# Altium PCB PCB1.1.PcbDoc (part 1 of 2)
Units mm, origin at the board's own origin, x right, y up, seen from the top; angles counter-clockwise.
Board outline 43 x 43 mm, 4 copper layers (Top Layer, Mid-Layer 1, Mid-Layer 2, Bottom Layer); 149 components, 104 nets, 520 pads, 244 vias.
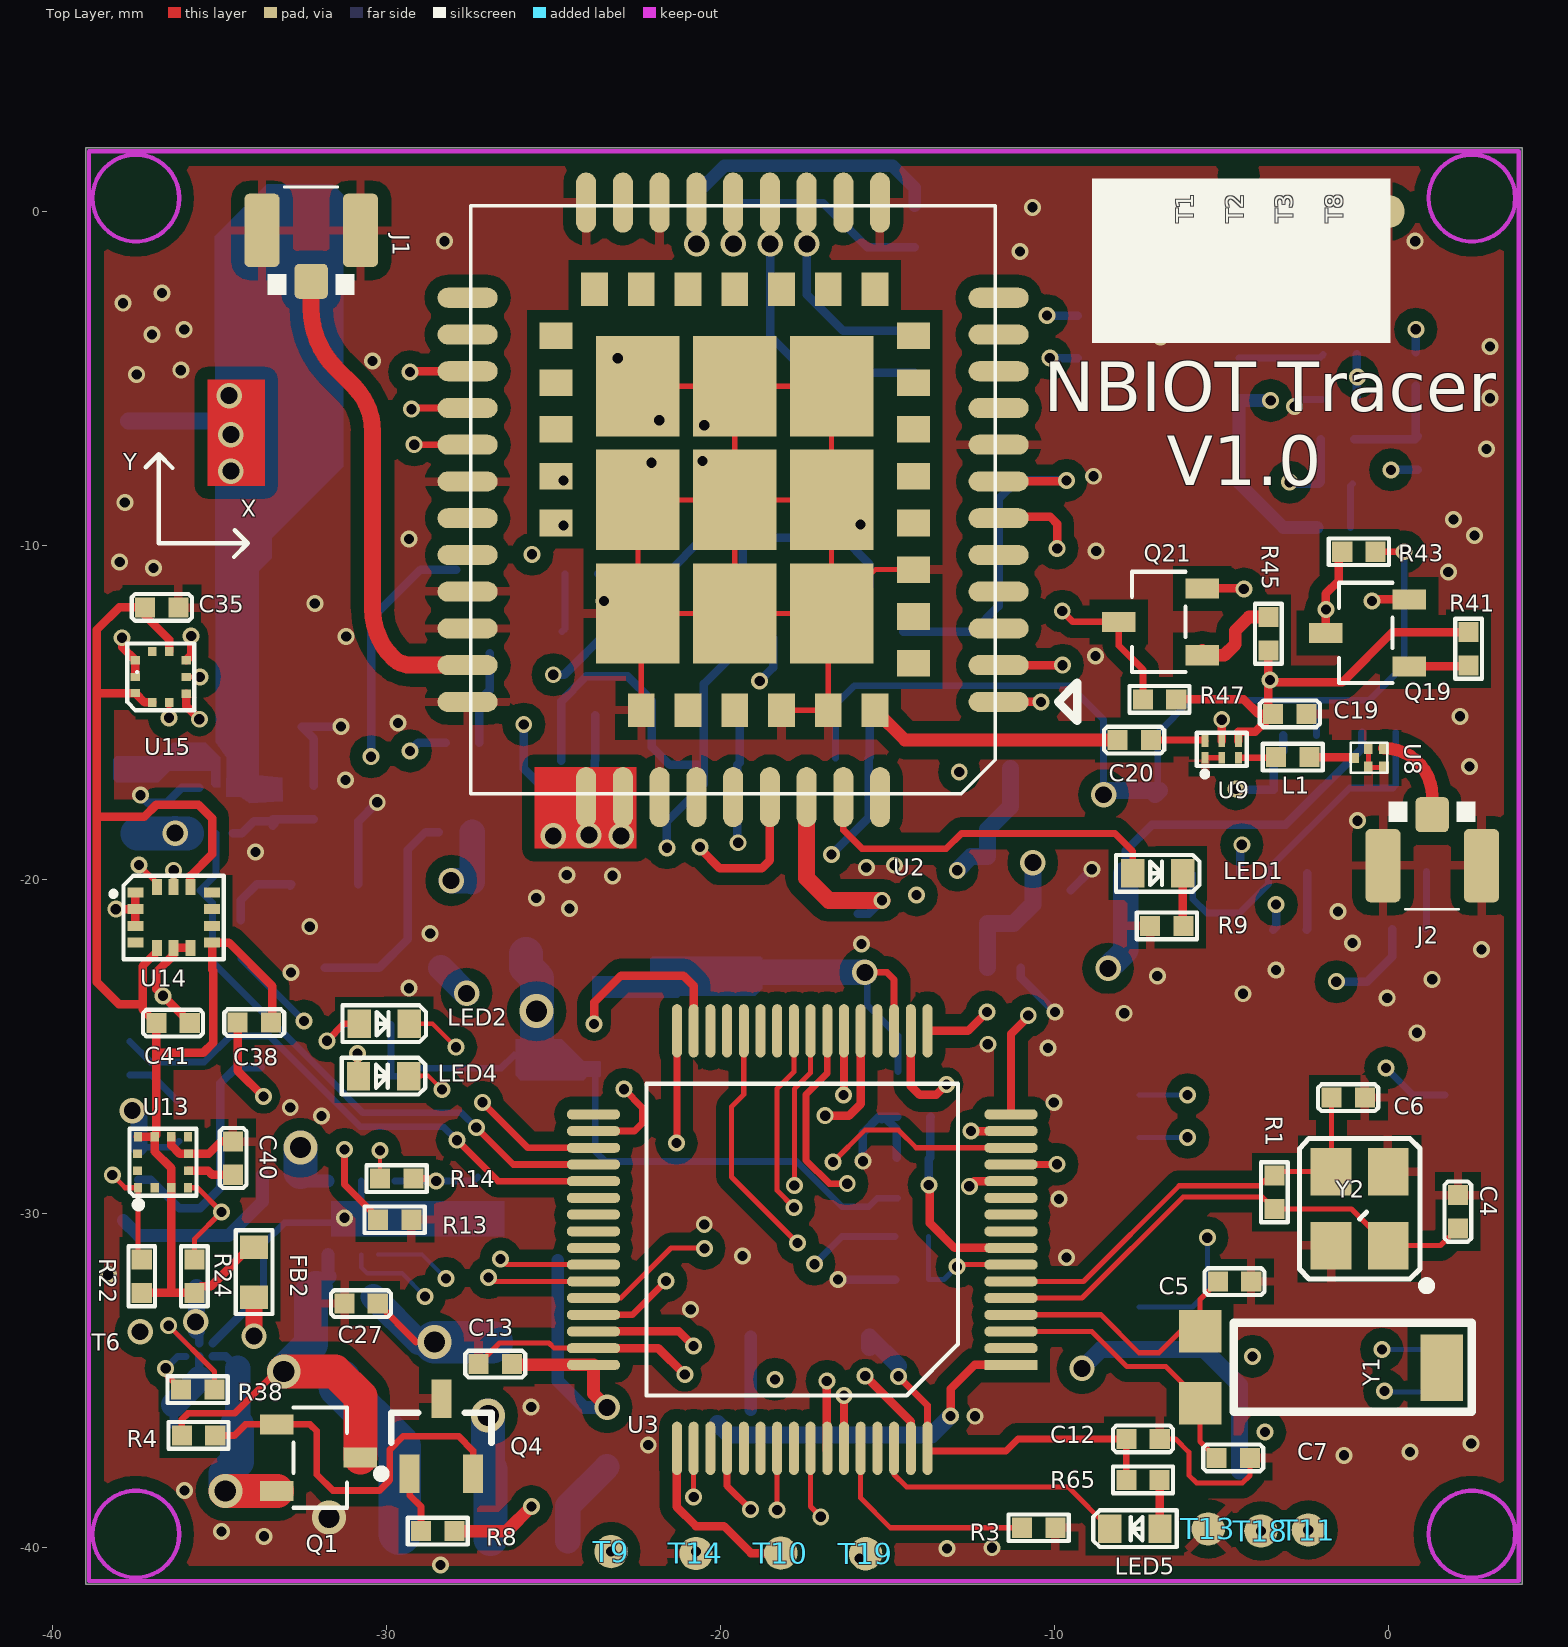
[diagram p0: Top Layer view]
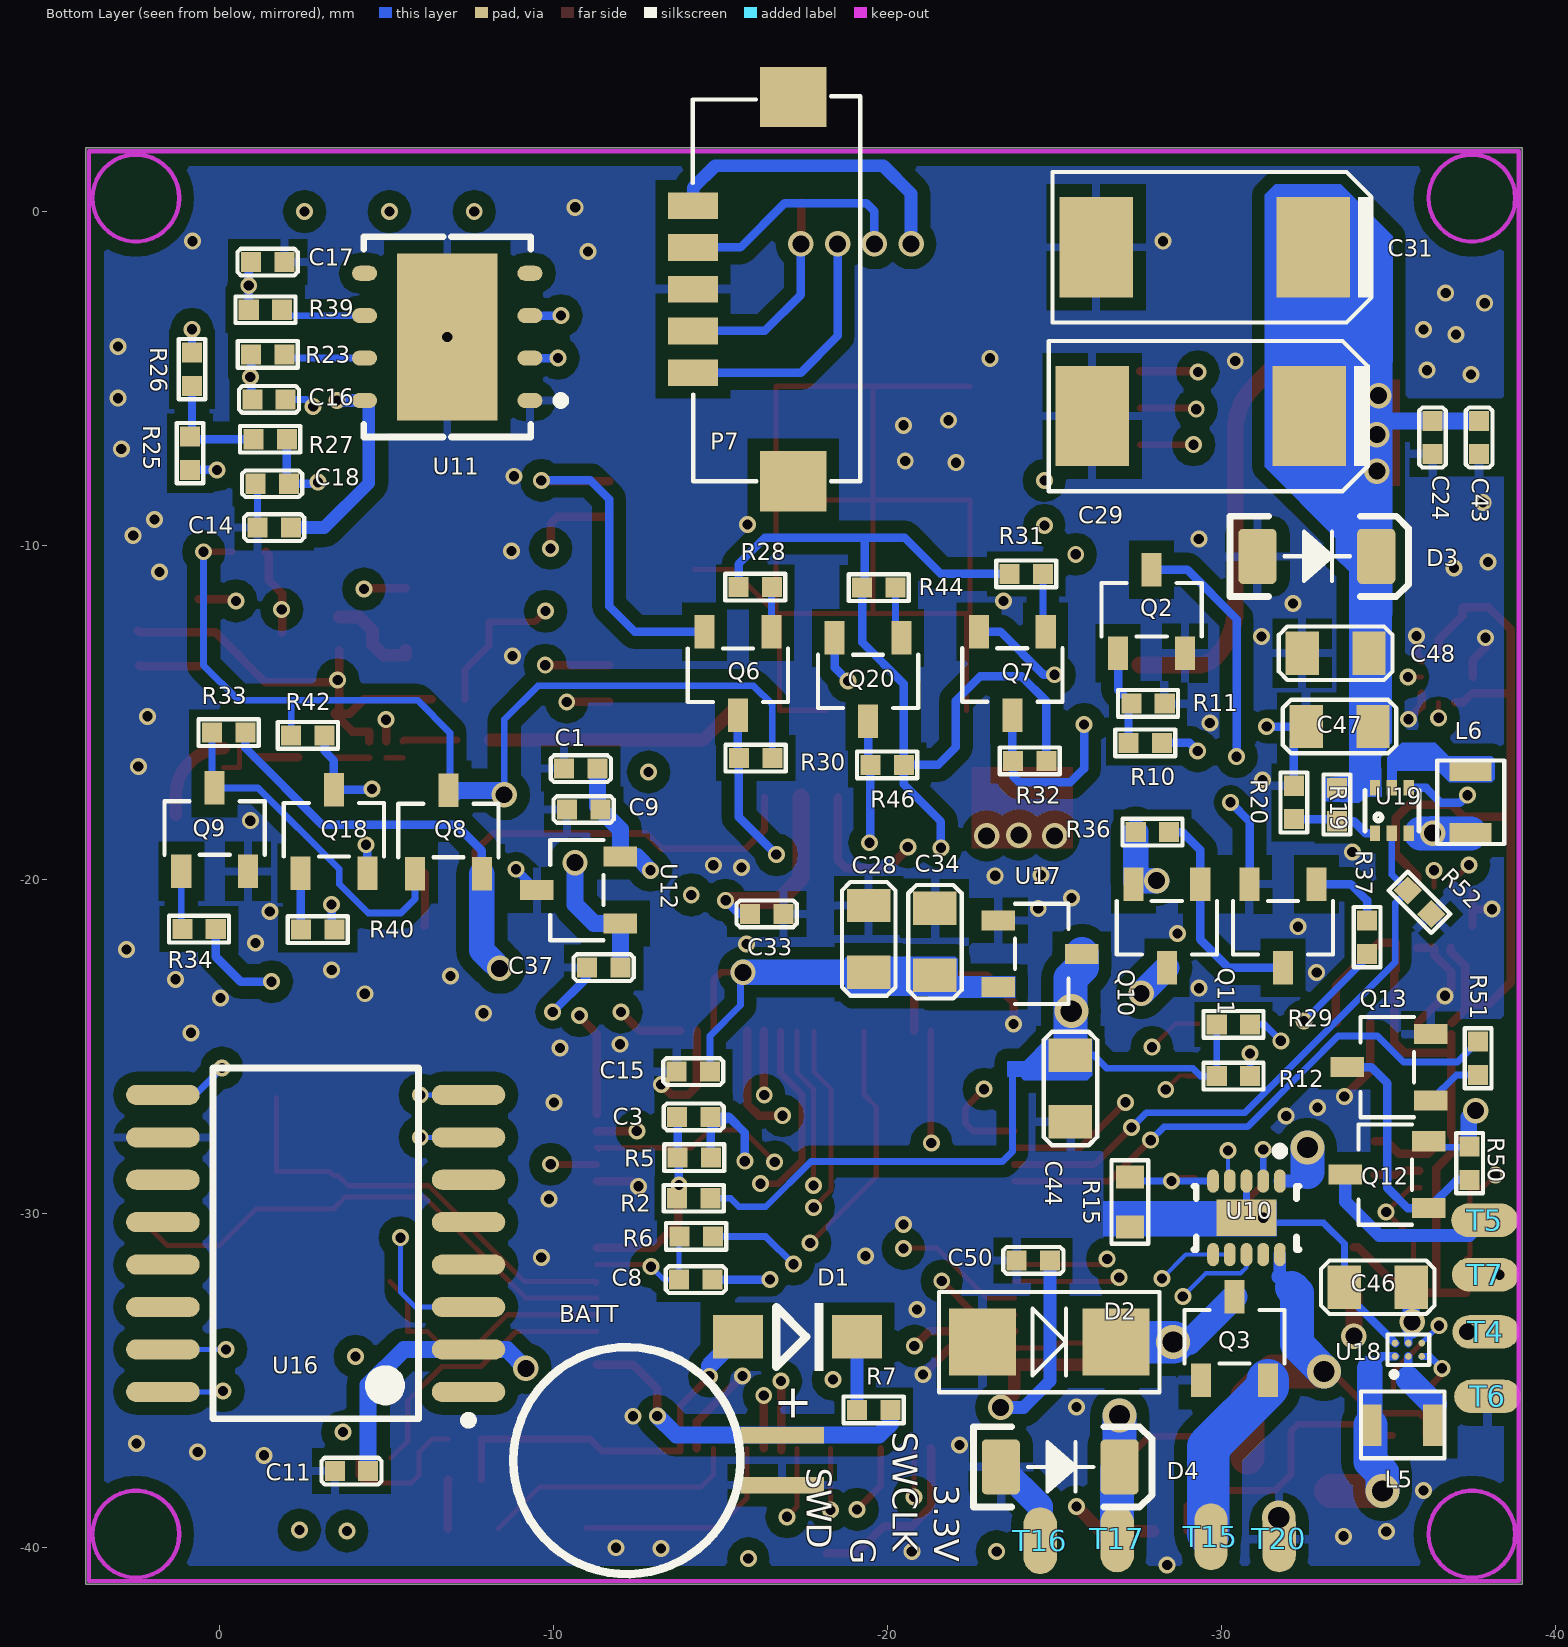
[diagram p1: Bottom Layer view, seen from below]
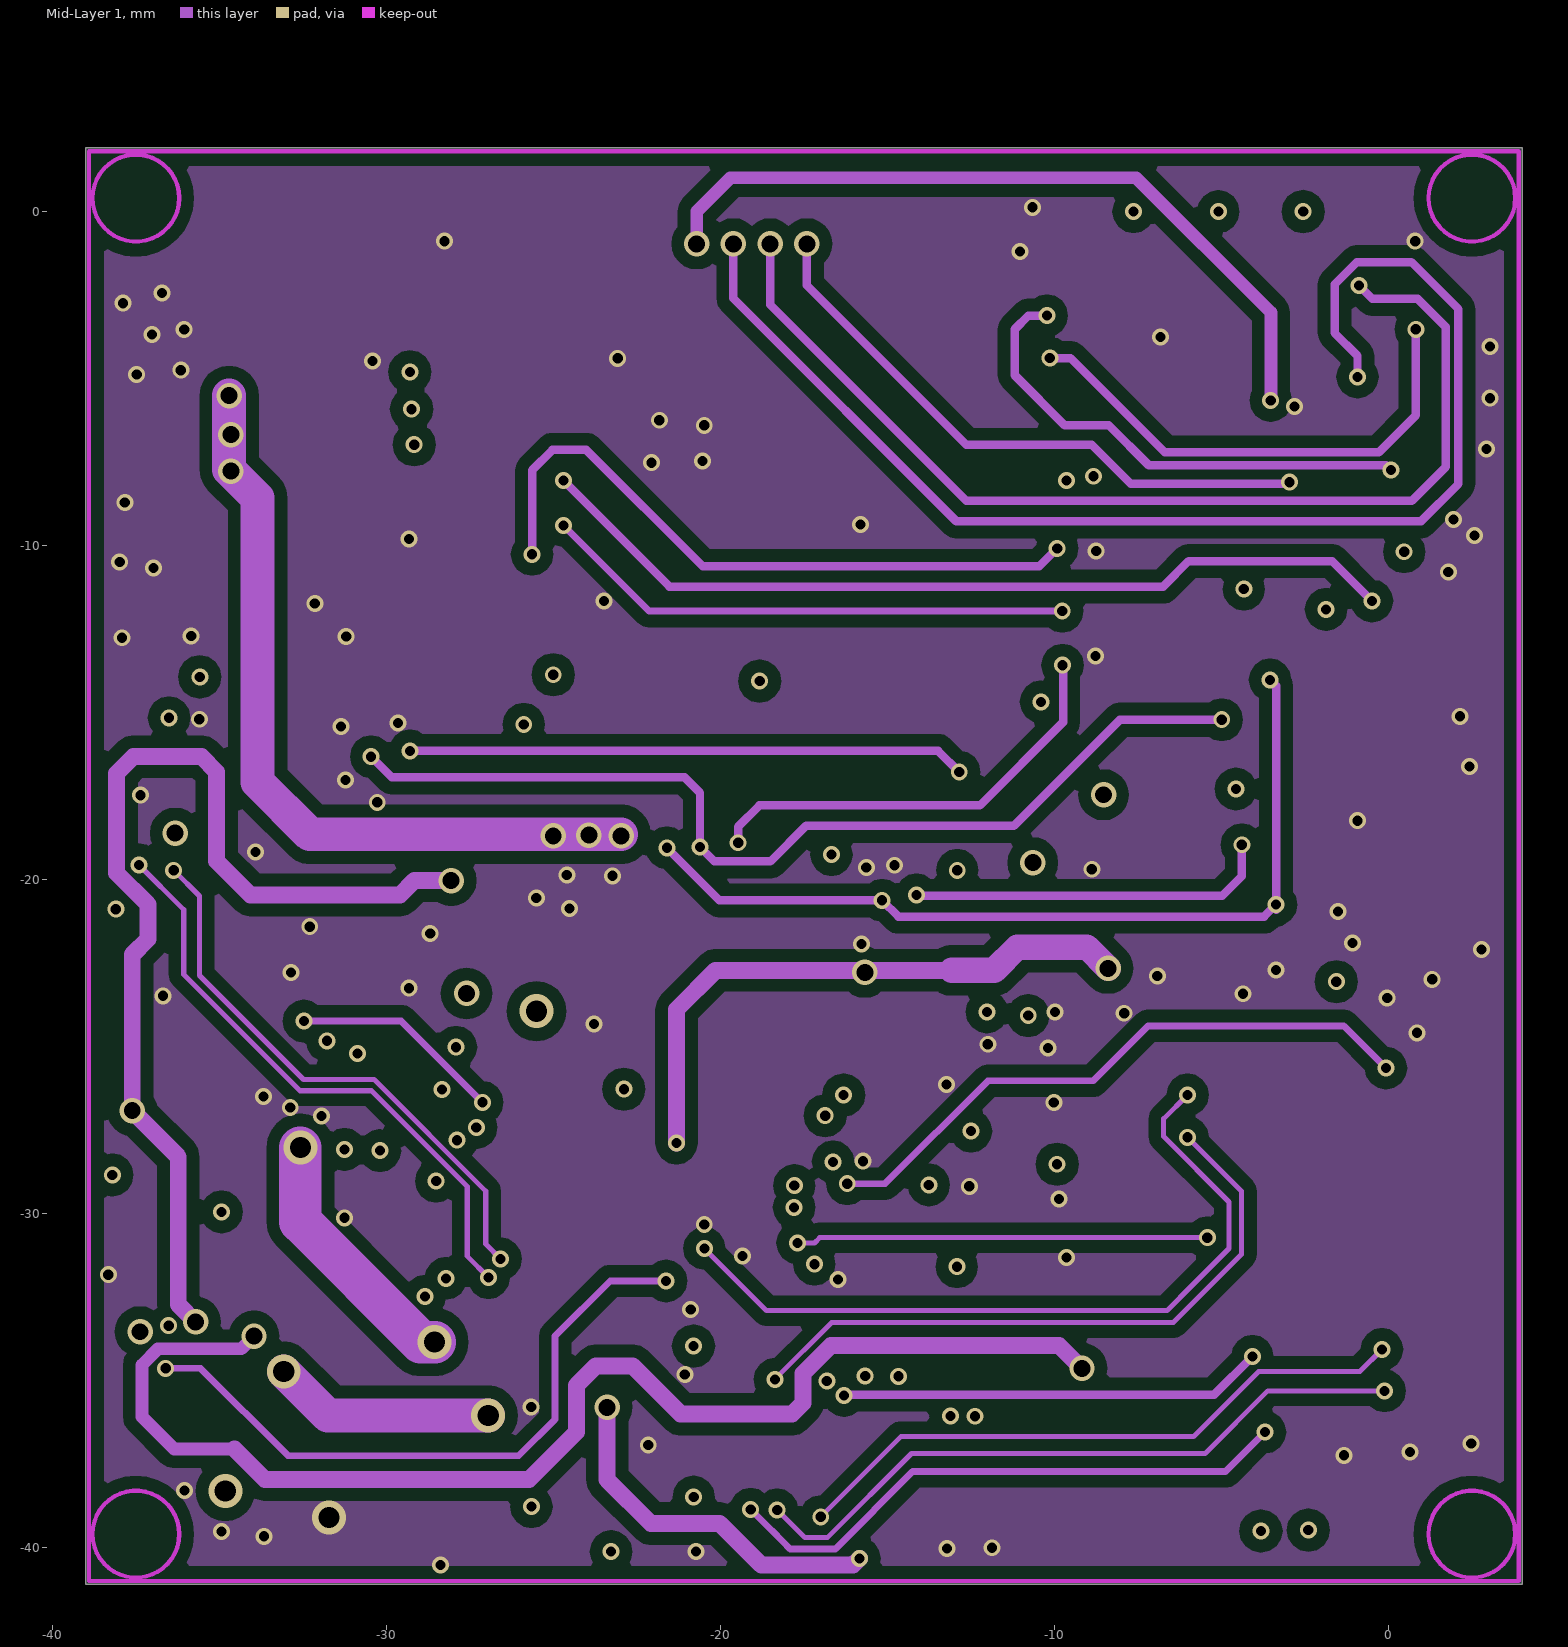
[diagram p2: Mid-Layer 1]
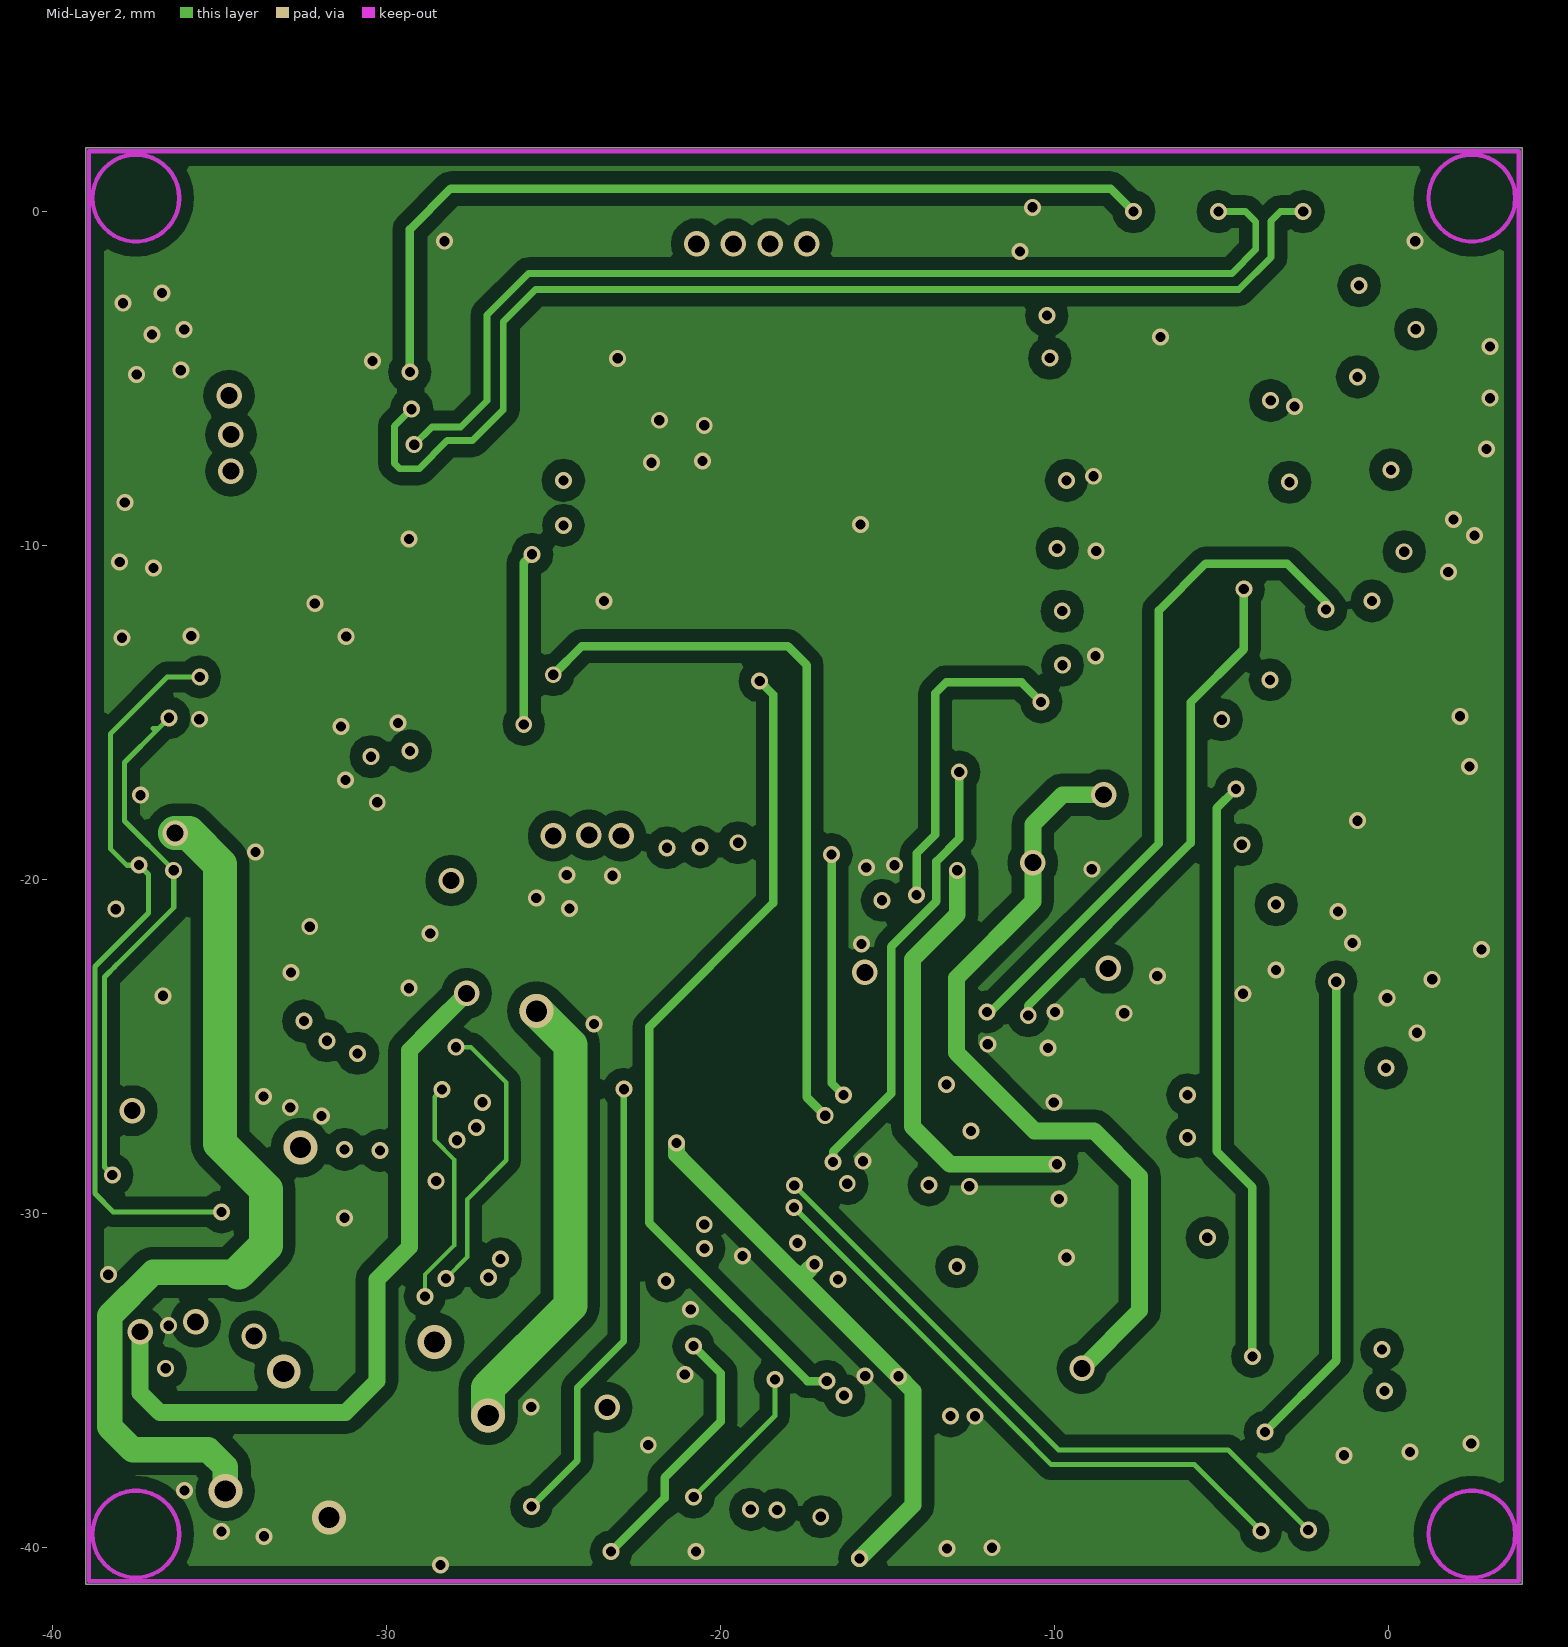
[diagram p3: Mid-Layer 2]

## Layer stack, top to bottom
Top Layer: signal copper 0.0356
Dielectric: core 0.32, FR-4, Dk 4.8
Mid-Layer 1: signal copper 0.0356
Dielectric: prepreg 0.32, FR-4, Dk 4.8
Mid-Layer 2: signal copper 0.0356
Dielectric: core 0.32, FR-4, Dk 4.8
Bottom Layer: signal copper 0.0356

## Board outline
-38.989,-41.097 -38.989,1.903 4.011,1.903 4.011,-41.097

## Design rules (kind name [scope] priority, off if disabled: settings)
Clearance [InPolygon  And InNet(AGND)] p1: gap=0.381
Clearance Clearance_1 [All] p2: gap=0.127
HoleToHoleClearance [All] p1: gap=0.127 allowstackedmicrovias=TRUE
MinimumSolderMaskSliver [All] p1: minsoldermaskwidth=0.025
PolygonConnect PolygonConnect_1 [InNet('AGND') And IsVia] p1: connectstyle=Direct reliefconductorwidth=0.254 reliefentries=4 polygonreliefangle="90 Angle"
PolygonConnect [All] p2: connectstyle=Relief reliefconductorwidth=0.254 reliefentries=4 polygonreliefangle="90 Angle"
RoutingVias [All] p1: holewidth=0.711 width=1.27 viastyle="Through Hole" minholewidth=0.711 minwidth=1.27 maxholewidth=0.711 maxwidth=1.27
SilkToSilkClearance [All] p1: silktosilkclearance=0.127
SilkscreenOverComponentPads [All] p1: minsilkscreentomaskgap=0.025
SolderMaskExpansion [All] p1: expansion=0.102
Width [All] p1: maxlimit=5.08 minlimit=0.127 preferedwidth=0.254
24 further rules are at their usual default settings.

## Classes and differential pairs
component class NBIOT: U2
component class CPU: BATT C3 C4 C5 C6 C7 C8 C9 C11 C12 C13 C15 C50 D1 LED5 R1 R2 R3 R5 R6 R7 R65 T9 T10 T11 T13 T14 T18 T19 U3 U16 U? Y1 Y2
component class GPS&&lte2: C14 C16 C17 C18 C19 C20 C24 C29 C31 C33 C43 D3 J1 J2 L1 LED1 P7 Q2 Q6 Q7 Q18 Q19 Q20 Q21 R9 R10 R11 R23 R25 R26 R27 R28 R30 R31 R32 R39 R40 R41 R42 R43 R44 R45 R46 R47 T1 T2 T3 T8 U8 U9 U11
component class power: C1 C27 C28 C34 C37 C44 C46 C47 C48 D2 D4 L5 L6 LED2 LED4 Q1 Q3 Q4 Q8 Q9 Q10 Q11 Q12 Q13 R4 R8 R12 R13 R14 R15 R19 R20 R29 R33 R34 R36 R37 R38 R50 R51 R52 T4 T5 T6 T7 T15 T16 T17 T20 U10 U12 U17 U18 U19
component class sensors: C35 C38 C40 C41 FB2 R22 R24 U13 U14 U15

## Components (designator, comment, footprint, x,y, rotation, side; value= is the part's Value field where it differs from the comment)
BATT "MS621FE" MS621FE -16.84,-37.383 r180 bottom
C1 "0.1uF/25V" 0402c -11.31,-16.681 r0 bottom
C3 "0.1uF/25v" 0402c -13.69,-27.103 r180 bottom
C4 "22pF" 0402c 2.09,-29.441 r270 top
C5 "6pF" 0402c -5.095,-32.038 r0 top
C6 "22pF" 0402c -0.694,-26.531 r180 top
C7 "6pF" 0402c -5.136,-37.314 r0 top
C8 "0.1uF/25V" 0402C -14.754,-31.977 r0 bottom
C9 "0.1uF/25V" 0402C -10.394,-17.903 r180 bottom
C11 "0.1uF/25V" 0402C -3.445,-37.711 r180 bottom
C12 "0.1uF/25V" 0402C -6.835,-36.749 r180 top
C13 "0.1uF/25V" 0402C -27.229,-34.504 r0 top
C14 "0.1uF" 0402C -1.128,-9.461 r180 bottom
C15 "0.1uF/25V" 0402C -13.675,-25.749 r180 bottom
C16 "10pF/NC" 0402C -1.975,-5.625 r0 bottom
C17 "10pF/NC" 0402C -1.932,-1.513 r0 bottom
C18 "10pF/NC" 0402C -1.067,-8.149 r180 bottom
C19 "0.1uF" 0402C -2.438,-15.037 r180 top
C20 "36pF" 0402c -8.103,-15.824 r0 top
C24 "10pF" 0402C -36.309,-7.265 r90 bottom
C27 "1uF/25V" 0402C -30.248,-32.697 r180 top
C28 "22uF/10V" 0805C -19.428,-22.776 r90 bottom
C29 "1000uF" 7343 -32.618,-6.125 r0 bottom
C31 "1000uF" 7343 -32.735,-1.069 r0 bottom
C33 "0.1uF/25V" 0402C -16.872,-21.025 r0 bottom
C34 "22uF/10V" 0805C -21.412,-22.859 r90 bottom
C35 "0.1uF/25V" 0402C -36.211,-11.851 r180 top
C37 "0.1uF/25V" 0402c -11.993,-22.635 r0 bottom
C38 "0.1uF/25V" 0402C -34.445,-24.286 r0 top
C40 "220nF" 0402c -34.578,-28.838 r90 top
C41 "0.1uF/25V" 0402C -35.876,-24.3 r180 top
C43 "33pF" 0402C -37.706,-7.265 r90 bottom
C44 "22uF/10V" 0805C -25.469,-25.256 r270 bottom
C46 "22uF/10V" 0805C -35.672,-32.206 r0 bottom
C47 "22uF/10V" 0805C -34.527,-15.418 r0 bottom
C48 "22uF/10V" 0805C -34.409,-13.223 r0 bottom
C50 "0.1uF/25V" 0402C -23.86,-31.4 r180 bottom
D1 "1N4148" DIODE_SOP -15.521,-33.693 r180 bottom
D2 "SMAJ12CA" SMA -22.836,-33.846 r180 bottom
D3 "DIODE_SCHOTTKY_0" LL-34(D1206) -32.847,-10.323 r180 bottom
D4 "DIODE_SCHOTTKY_0" LL-34(D1206) -25.164,-37.584 r180 bottom
FB2 "10R/1A" 0603R -33.952,-32.503 r90 top
J1 "IPEX" RF-UFL -32.241,-0.565 r0 top
J2 "IPEX" RF-UFL 1.321,-19.583 r180 top
L1 "LQW15A" 0402R -3.353,-16.332 r0 top
L5 "SRP4020TA-2R2M" L2520 -34.457,-36.336 r180 bottom
L6 "SRP4020TA-1R0M" L2520 -37.445,-16.725 r270 bottom
LED1 "LED" 0603LED -7.645,-19.812 r0 top
LED2 "LED" 0603LED -30.802,-24.316 r0 top
LED4 "LED" 0603LED -30.825,-25.886 r0 top
LED5 "LED" 0603LED -6.828,-39.433 r180 top
P7 "Header 5" 5×1.25mmSMT -14.173,-4.826 r90 bottom
Q1 "WNM2016-3/TR" sot23-3 -33.268,-36.31 r180 top
Q2 "MMBT3904" SOT23-3 -26.899,-13.221 r270 bottom
Q3 "Si2369DS" sot23-3 -29.382,-34.989 r270 bottom
Q4 "S8550" SOT95P240-3N -28.34,-36.666 r90 top
Q6 "MMBT3904" SOT23-3 -16.515,-12.583 r90 bottom
Q7 "MMBT3904" SOT23-3 -24.73,-12.577 r90 bottom
Q8 "Si2369DS" sot23-3 -5.846,-19.831 r270 bottom
Q9 "S8050" SOT23-3 1.152,-19.756 r270 bottom
Q10 "Si2369DS" sot23-3 -29.356,-20.14 r90 bottom
Q11 "S8050" SOT23-3 -32.833,-20.14 r90 bottom
Q12 "Si2369DS" sot23-3 -36.195,-29.834 r180 bottom
Q13 "S8050" SOT23-3 -36.253,-26.618 r180 bottom
Q18 "MMBT3904" SOT23-3 -2.42,-19.807 r270 bottom
Q19 "MMBT3904" SOT23-3 0.635,-13.614 r0 top
Q20 "MMBT3904" SOT23-3 -20.411,-12.766 r90 bottom
Q21 "MMBT3904" SOT23-3 -5.563,-13.284 r0 top
R1 "1MR" 0402R -3.404,-29.862 r90 top
R2 "10K/1%" 0402R -14.69,-29.541 r0 bottom
R3 "100K" 0402R -10.962,-39.406 r0 top
R4 "4K7" 0402R -36.113,-36.64 r0 top
R5 "10K/1%" 0402R -13.706,-28.322 r180 bottom
R6 "10K" 0402R -14.761,-30.684 r0 bottom
R7 "470" 0402R -19.077,-35.878 r180 bottom
R8 "4K7" 0402R -28.95,-39.51 r0 top
R9 "1K" 0402R -6.121,-21.387 r180 top
R10 "4.7K" 0402R -27.207,-15.906 r180 bottom
R11 "47K" 0402R -27.292,-14.723 r180 bottom
R12 "1K/1%" 0402R -29.85,-25.886 r180 bottom
R13 "3.95K/1%" 0402R -30.241,-30.185 r0 top
R14 "21.5k/1%" 0402R -29.184,-28.953 r180 top
R15 "RTH103AT" 0603R -27.252,-30.403 r90 bottom
R19 "534K/1%" 0402R -33.449,-17.254 r270 bottom
R20 "100K/1%" 0402R -32.16,-17.191 r270 bottom
R22 "4.7K" 0402R -37.313,-32.377 r90 top
R23 "10R" 0402R -0.937,-4.274 r180 bottom
R24 "4.7K" 0402R -35.738,-31.377 r270 top
R25 "0R" 0402R 0.891,-7.734 r90 bottom
R26 "0R" 0402R 0.83,-4.219 r270 bottom
R27 "10R" 0402R -2.01,-6.818 r0 bottom
R28 "4.7K" 0402R -16.532,-11.242 r0 bottom
R29 "1K/1%" 0402R -29.85,-24.336 r180 bottom
R30 "10K" 0402R -15.543,-16.365 r180 bottom
R31 "4.7K" 0402R -24.645,-10.847 r0 bottom
R32 "4.7K" 0402R -23.751,-16.447 r180 bottom
R33 "4K7" 0402R -0.766,-15.598 r0 bottom
R34 "4K7" 0402R 1.12,-21.483 r180 bottom
R36 "4K7" 0402R -27.425,-18.576 r180 bottom
R37 "4K7" 0402R -34.352,-21.225 r270 bottom
R38 "10K/1%" 0402R -35.138,-35.268 r180 top
R39 "10R" 0402R -0.868,-2.941 r180 bottom
R40 "4.7K" 0402R -2.436,-21.5 r180 bottom
R41 "4.7K" 0402R 2.413,-13.589 r90 top
R42 "10K" 0402R -3.138,-15.686 r0 bottom
R43 "10K" 0402R -1.372,-10.185 r0 top
R44 "4.7K" 0402R -20.232,-11.261 r0 bottom
R45 "4.7K" 0402R -3.581,-12.141 r270 top
R46 "4.7K" 0402R -19.481,-16.57 r180 bottom
R47 "4.7K" 0402R -7.341,-14.605 r0 top
R50 "4K7" 0402R -37.421,-27.99 r270 bottom
R51 "4K7" 0402R -37.672,-25.848 r90 bottom
R52 "10K/1%" 0402R -36.273,-21.033 r45 bottom
R65 "1K" 0402R -6.837,-37.975 r180 top
T1 "TPD" TPD#1 -4.47,0 r90 top
T2 "TPD" TPD#2 -2.98,0 r90 top
T3 "TPD" TPD#3 -1.49,0 r90 top
T4 "TPD" TP#1 -37.904,-33.543 r180 top
T5 "TPD" TP#1 -37.87,-30.2 r180 top
T6 "TPD" TP#1 -37.958,-35.473 r0 top
T7 "TPD" TP#1 -37.893,-31.831 r180 top
T8 "TPD" TPD#4 0,0 r90 top
T9 "TPD" TPd#1 -23.26,-40.12 r90 top
T10 "TPD" TPd#2 -20.445,-40.165 r270 top
T11 "TPD" TPd#1 -2.387,-39.475 r135 top
T13 "TPD" TPd#1 -5.384,-39.443 r135 top
T14 "TPD" TPd#3 -21.776,-40.176 r270 top
T15 "TPD" TP#1 -29.677,-39.676 r270 top
T16 "TPD" TP#1 -24.564,-39.793 r270 top
T17 "TPD" TP#2 -26.869,-39.742 r270 bottom
T18 "TPD" TPd#1 -3.806,-39.504 r135 top
T19 "TPD" TPd#4 -19.009,-40.186 r135 top
T20 "TPD" TP#1 -31.719,-39.739 r270 top
U2 "SIM7080G" SIM868 -11.659,-14.681 r180 top
U3 "stm32l412r8t6" LQFP-64 -11.288,-34.53 r180 top
U8 "SAFFB1G56KB0F0A" SAFFB1G56KB0F0A -1.016,-16.358 r0 top
U9 "AW5005DNR" AW5005 -4.978,-16.104 r90 top
U10 "bq24210" QFN50P200X300X80-10N -30.739,-30.128 r270 bottom
U11 "SLI76CF3600P" QFN127P500X600X80-8N -6.812,-3.752 r0 bottom
U12 "REF3025AIDBZR" SOT23-3 -11.993,-21.314 r180 bottom
U13 "LIS2MDL" LIS2MDL -36.677,-28.464 r90 top
U14 "LSM6DS3TR" LSM6DS3TR-C -36.356,-21.138 r0 top
U15 "BMP388" BMP388 -36.744,-13.934 r180 top
U16 "MX25L51245GMI-10G" SOP127P1030X239-16N -2.873,-30.892 r0 bottom
U17 "MCP33-30" SOT23-3 -23.311,-21.222 r0 bottom
U18 "TPS610997YFFR" TPS610997YFFR -35.587,-34.077 r90 bottom
U19 "TPS61023" SOT563-6 -35.088,-17.94 r180 bottom
Y1 "MC-146 32.768K/6pF" 32.768K -5.629,-35.684 r90 top
Y2 "8MHz" OSCILLATOR-3.2X2.5 -0.847,-29.858 r90 top

## Footprints (in the part's own frame and the unit in brackets; to place one, negate y for a bottom-side part, rotate by r counter-clockwise, add the part's x,y. Pads: shape width x height; smd on the part's side, far side on the other; paste and mask are expansions set on the pad)
5×1.25mmSMT [mm]
  rect 1.8x2 smd: 0(-3.25,-3) 0(8.25,-3)
  rect 0.8x1.5 smd: 1(0,0) 2(1.25,0) 3(2.5,0) 4(3.75,0) 5(5,0)
  round 0.5 on Bottom Overlay: ""(-0.875,0.432)
  silkscreen extent -3.25,-5 8.28,0.02
32.768K [mm]
  rect 1.27x1.27 smd: 1(0,0) 2(2.159,0)
  rect 2x1.27 smd: 3(1.07,-7.239)
  silkscreen extent -0.25,-8.13 2.41,-1.02
0402c [mm]
  rect 0.6x0.6 smd: 1(0,0) 2(1,0)
  silkscreen extent -0.4,-0.4 1.4,0.4
0402C [mm]
  rect 0.6x0.6 smd: 1(0,0) 2(1,0)
  silkscreen extent -0.4,-0.4 1.4,0.4
0402R [mm]
  rect 0.6x0.6 smd: 1(0,0) 2(1,0)
  silkscreen extent -0.4,-0.4 1.4,0.4
0603LED [mm]
  rect 0.7x0.85 smd: 1(0,0) 2(1.5,0)
  silkscreen extent -0.5,-0.55 2,0.55
0603R [mm]
  rect 0.7x0.85 smd: 1(0,0) 2(1.5,0)
  silkscreen extent -0.5,-0.55 2,0.55
0805C [mm]
  rect 1x1.3 smd: 1(0,0) 2(2,0)
  silkscreen extent -0.7,-0.8 2.7,0.8
7343 [mm]
  rect 2.2x3 smd: 1(0,0) 2(6.5,0)
  silkscreen extent -1.75,-2.25 7.8,2.25
AW5005 [mm]
  rect 0.35x0.2 smd: 1(-0.25,0.5) 2(-0.25,0) 3(-0.25,-0.5) 4(0.25,-0.5) 5(0.25,0) 6(0.25,0.5)
  silkscreen extent -0.77,-0.75 0.5,0.75
BMP388 [mm]
  rect 0.25x0.275 smd: 1(0.25,0.763) 2(-0.25,0.763) 6(-0.25,-0.763) 7(0.25,-0.763)
  rect 0.275x0.25 smd: 3(-0.762,0.5) 4(-0.762,0) 5(-0.762,-0.5) 8(0.763,-0.5) 9(0.763,0) 10(0.763,0.483)
  silkscreen extent -1,-1 1,1
DIODE_SOP [mm]
  rect 1.5x1.3 smd: 1(0,0) 2(3.556,0)
  silkscreen extent 1.14,-1.02 2.56,1.02
L2520 [mm]
  rect 0.65x1.25 smd: 1(0,0) 2(1.9,0)
  silkscreen extent -0.29,-0.99 2.21,1.01
LIS2MDL [mm]
  rect 0.275x0.25 smd: 1(-0.763,0.75) 2(-0.763,0.25) 3(-0.763,-0.25) 4(-0.763,-0.75) 7(0.763,-0.75) 8(0.763,-0.25) 9(0.763,0.25) 10(0.763,0.75)
  rect 0.25x0.275 smd: 5(-0.25,-0.763) 6(0.25,-0.763) 11(0.25,0.762) 12(-0.25,0.762)
  silkscreen extent -1.35,-1 1,1
LL-34(D1206) [mil]
  rrect25% 45x65 smd: 1(-70,0) 2(70,0)
  silkscreen extent -102,-47 108,47, body extent -70,-28 68,30, height 56
LQFP-64 [mm]
  rect 1.6x0.3 smd: 1(0,0)
  oval 1.6x0.3 smd: 2(0,-0.5) 3(0,-1) 4(0,-1.5) 5(0,-2) 6(0,-2.5) 7(0,-3) 8(0,-3.5) 9(0,-4) 10(0,-4.5) 11(0,-5) 12(0,-5.5) 13(0,-6) 14(0,-6.5) 15(0,-7) 16(0,-7.5) 33(12.5,-7.5) 34(12.5,-7) 35(12.5,-6.5) 36(12.5,-6) 37(12.5,-5.5) 38(12.5,-5) 39(12.5,-4.5) 40(12.5,-4) 41(12.5,-3.5) 42(12.5,-3) 43(12.5,-2.5) 44(12.5,-2) 45(12.5,-1.5) 46(12.5,-1) 47(12.5,-0.5) 48(12.5,0)
  oval 0.3x1.6 smd: 17(2.5,-10) 18(3,-10) 19(3.5,-10) 20(4,-10) 21(4.5,-10) 22(5,-10) 23(5.5,-10) 24(6,-10) 25(6.5,-10) 26(7,-10) 27(7.5,-10) 28(8,-10) 29(8.5,-10) 30(9,-10) 31(9.5,-10) 32(10,-10) 49(10,2.5) 50(9.5,2.5) 51(9,2.5) 52(8.5,2.5) 53(8,2.5) 54(7.5,2.5) 55(7,2.5) 56(6.5,2.5) 57(6,2.5) 58(5.5,2.5) 59(5,2.5) 60(4.5,2.5) 61(4,2.5) 62(3.5,2.5) 63(3,2.5) 64(2.5,2.5)
  silkscreen extent 1.59,-8.41 10.91,0.91
LSM6DS3TR-C [mm]
  rect 0.48x0.3 smd: 1(-1.15,0.75) 2(-1.15,0.25) 3(-1.15,-0.25) 4(-1.15,-0.75) 8(1.15,-0.75) 9(1.15,-0.25) 10(1.15,0.25) 11(1.15,0.75)
  rect 0.3x0.48 smd: 5(-0.5,-0.91) 6(0,-0.91) 7(0.5,-0.91) 12(0.5,0.91) 13(0,0.91) 14(-0.5,0.91)
  silkscreen extent -1.83,-1.25 1.5,1.25
MS621FE [mm]
  rect 2.5x0.5 smd: 1(0,-0.749) 2(0,0.749)
  silkscreen extent -8.05,-3.41 -1.25,3.39
OSCILLATOR-3.2X2.5 [mil] "OSCILLATOR-3.2X2.5"
  rect 56x48 smd: 1(-43.31,-33.46) 2(44,-33.46) 3(44,34) 4(-43.31,34)
  silkscreen extent -95,-83 83,71
QFN50P200X300X80-10N [mm] "QFN, 10-Leads, Body 2.9x1.9mm (max), Pitch 0.50mm, IPC Medium Density"
  oval 0.7x0.35 smd: 1(-1.1,1) 2(-1.1,0.5) 3(-1.1,0) 4(-1.1,-0.5) 5(-1.1,-1) 6(1.1,-1) 7(1.1,-0.5) 8(1.1,0) 9(1.1,0.5) 10(1.1,1)
  rect 1.1x1.8 smd: 11(0,0)
  silkscreen extent -2.12,-1.58 0.95,1.58, body extent -0.95,-1.45 0.95,1.45, height 0.8
QFN127P500X600X80-8N [mm] "QFN, 8-Leads, Body 6.0x5.0mm (max), Pitch 1.27mm, IPC Medium Density"
  oval 0.75x0.45 smd: 1(-2.475,1.905) 2(-2.475,0.635) 3(-2.475,-0.635) 4(-2.475,-1.905) 5(2.475,-1.905) 6(2.475,-0.635) 7(2.475,0.635) 8(2.475,1.905)
  rect 3x5 smd: 9(0,0)
  silkscreen extent -3.52,-3 2.5,3
RF-UFL [mm]
  rrect30% 1x1.05 smd: 1(0,-1.525)
  rrect30% 1.05x2.2 smd: 2(-1.475,0) 2(1.475,0)
  silkscreen extent -1.3,-1.93 1.3,1.3, body extent -1.7,-1.55 1.7,1.55, height 1.25
SAFFB1G56KB0F0A [mm]
  rect 0.3x0.3 smd: 1(0,0)
  rect 0.25x0.35 smd: 2(0.425,-0.287) 5(0.425,0.288)
  rect 0.3x0.35 smd: 3(0.9,-0.287) 4(0.9,0.288)
  silkscreen extent -0.1,-0.44 1,0.46
SIM868 [mm]
  oval 1.8x0.6 smd: 1(0,0) 2(0,-1.1) 3(0,-2.2) 4(0,-3.3) 5(0,-4.4) 6(0,-5.5) 7(0,-6.6) 8(0,-7.7) 9(0,-8.8) 10(0,-9.9) 11(0,-11) 12(0,-12.1) 22(15.9,-12.1) 23(15.9,-11) 24(15.9,-9.9) 25(15.9,-8.8) 26(15.9,-7.7) 27(15.9,-6.6) 28(15.9,-5.5) 29(15.9,-4.4) 30(15.9,-3.3) 31(15.9,-2.2) 32(15.9,-1.1) 33(15.9,0)
  oval 0.6x1.8 smd: 13(3.55,-14.95) 14(4.65,-14.95) 15(5.75,-14.95) 16(6.85,-14.95) 17(7.95,-14.95) 18(9.05,-14.95) 19(10.15,-14.95) 20(11.25,-14.95) 21(12.35,-14.95) 34(12.35,2.85) 35(11.25,2.85) 36(10.15,2.85) 37(9.05,2.85) 38(7.95,2.85) 39(6.85,2.85) 40(5.75,2.85) 41(4.65,2.85) 42(3.55,2.85)
  rect 1x0.8 smd: 43(2.549,-1.159) 44(2.549,-2.559) 45(2.549,-3.959) 46(2.549,-5.359) 47(2.549,-6.759) 48(2.549,-8.159) 49(2.549,-9.559) 50(2.549,-10.959) 58(13.251,-10.959) 59(13.251,-9.559) 60(13.251,-8.159) 61(13.251,-6.759) 62(13.251,-5.359)
  rect 0.8x1 smd: 51(3.7,-12.359) 52(5.1,-12.359) 53(6.5,-12.359) 54(7.9,-12.359) 55(9.3,-12.359) 56(10.7,-12.359) 57(12.1,-12.359) 63(10.7,0.25) 64(9.3,0.25) 65(7.9,0.25) 66(6.5,0.25) 67(5.1,0.25) 68(3.7,0.25)
  rect 2.5x3 smd: 69(5,-2.65) 70(5,-6.05) 71(5,-9.45) 72(7.9,-9.45) 73(10.8,-9.45) 74(10.8,-6.05) 75(10.8,-2.65) 76(7.9,-2.65) 77(7.9,-6.05)
  silkscreen extent -2.35,-14.85 15.8,2.75
SMA [mm]
  rect 2x2 smd: 1(0,0) 2(4,0)
  silkscreen extent -1.3,-1.5 5.3,1.5
SOP127P1030X239-16N [mm] "SOP, 16-Leads, Body 10.5x7.6mm (max), Pitch 1.27mm, IPC Medium Density"
  oval 2.2x0.6 smd: 1(-4.575,4.445) 2(-4.575,3.175) 3(-4.575,1.905) 4(-4.575,0.635) 5(-4.575,-0.635) 6(-4.575,-1.905) 7(-4.575,-3.175) 8(-4.575,-4.445) 9(4.575,-4.445) 10(4.575,-3.175) 11(4.575,-1.905) 12(4.575,-0.635) 13(4.575,0.635) 14(4.575,1.905) 15(4.575,3.175) 16(4.575,4.445)
  silkscreen extent -4.7,-5.25 3.07,5.42, body extent -3.8,-5.25 3.8,5.25, height 2.39
sot23-3 [mm]
  rect 1x0.6 smd: 1(0,0) 2(0,2) 3(-2.5,1)
  silkscreen extent -2.1,-0.5 -0.5,2.5
SOT23-3 [mm]
  rect 1x0.6 smd: 1(0,0) 2(0,2) 3(-2.5,1)
  silkscreen extent -2.1,-0.5 -0.5,2.5
SOT95P240-3N [mm] "SOT23, 3-Leads, Body 2.9x1.3mm, Pitch 0.95mm, Lead Span 2.4mm, IPC Medium Density"
  rect 1.15x0.6 smd: 1(-1.125,0.95) 2(-1.125,-0.95) 3(1.125,0)
  silkscreen extent -1.25,-1.5 0.7,1.92, body extent -0.7,-1.5 0.7,1.5, height 1.14
SOT563-6 [mil] "SOT563-6"
  rect 12x18 smd: 1(-19.68,-26.57) 2(0,-26.57) 3(20,-26.57) 4(20,27) 5(0,27) 6(-19.69,27)
  silkscreen extent -31,-24 32,24
TP#1 [mm]
  oval 2x1 smd far side: 1(0,0)
TP#2 [mm]
  oval 2x1 smd: 1(0,0)
TPD#1 [mm]
  round 1 smd: 1(0,3.15)
TPD#2 [mm]
  round 1 smd: 1(0,2.1)
TPD#3 [mm]
  round 1 smd: 1(0,1.05)
TPD#4 [mm]
  round 1 smd: 1(0,0)
TPd#1 [mm]
  round 1 smd: 1(0,0)
TPd#2 [mm]
  round 1 smd: 1(0,2.265)
TPd#3 [mm]
  round 1 smd: 1(0,1.056)
TPd#4 [mm]
  round 1 smd: 1(-2.382,-2.382)
TPS610997YFFR [mm]
  round 0.2 smd: A1(-0.2,0.4) A2(0.2,0.4) B1(-0.2,0) B2(0.2,0) C1(-0.2,-0.4) C2(0.2,-0.4)
  silkscreen extent -0.77,-0.63 0.46,0.63

## Part data
BATT: library part SBatery
C1 C20 C37: library part Cap, "Capacitor"
C3 C4 C5 C6 C7 C8 C9 C11 C12 C13 C14 C15 C16 C17 C18 C19 C24 C27 C28 C33 C34 C35 C38 C40 C41 C43 C44 C46 C47 C48 C50: library part CAP, "Capacitor"
C29 C31: library part "Cap Pol3", "Polarized Capacitor (Surface Mount)"
D1: library part D
D2: library part DIODE_SCHOTTKY_0
FB2: library part INDUCTOR1
J1 J2: library part ANT
L1 L5 L6: library part INDUCTOR_1
P7: "Header, 5-Pin"
Q1 Q3 Q8 Q10 Q12: library part NCE4060K, "NMOSFET"
Q2 Q9 Q11 Q13: library part 2N1069_1
Q4: library part PNP, "PNP Bipolar Transistor"
Q6 Q7 Q18 Q19 Q20 Q21: library part NPN
R1: library part Res3, "Resistor"
R2 R4 R5 R8 R9 R10 R11 R12 R13 R14 R15 R19 R20 R22 R23 R24 R25 R26 R27 R28 R29 R30 R31 R32 R33 R34 R36 R37 R38 R39 R40 R41 R42 R43 R44 R45 R46 R47 R50 R51 R52 R65: library part RES1
R3 R6 R7: library part Res2, "Resistor"
U2: library part SIM868E/SIM868
U3: library part STM32L100R8T6, "ARM Cortex-M3 32-bit MCU, 64 KB Flash, 8 KB Internal RAM, 51 I/Os, 64-pin LQFP, -40 to 85 degC, Tray"
U8: library part SAFFB1G56KBOFA
U10: library part bq2410
U12 U17: library part REF3012
Y1 Y2: library part XTAL, "Crystal Oscillator"

## Via types
v1: diameter 0.508, hole 0.305, Top Layer to Bottom Layer, tented both sides, 214 vias
v2: diameter 0.762, hole 0.508, Top Layer to Bottom Layer, tented both sides, 23 vias
v3: diameter 1.016, hole 0.635, Top Layer to Bottom Layer, tented both sides, 7 vias

## Nets (pads, with @x,y where several pads share a name; then routed paths per layer and width w, separated by ;. In a path a pad name is that pad's centre, name@x,y a point inside that pad or via, vN(x,y) a via of type N, cw(c..) or ccw(c..) an arc to the next point about the centre after c; other vN are vias at no path point)
2.5V: C1.1 C9.2 U3.13 U12.2 | length 18.4
  Top Layer w0.203: U3.13@-11.288,-28.53 v1@-9.907,-28.53
  Mid-Layer 2 w0.508: v1(-12.897,-19.724) -12.897,-21.045 -14.243,-22.391 -14.243,-27.395 -13.115,-28.523 -9.914,-28.523 v1(-9.907,-28.523)
  Bottom Layer w0.508: v1(-12.897,-19.724) -12.488,-19.314 U12.2@-11.993,-19.314 -11.993,-18.501 C9.2@-11.394,-17.903 -11.31,-17.819 C1.1@-11.31,-16.681
AGND: BATT.1 C1.2 C3.2 C4.1 C5.2 C6.1 C7.2 C8.1 C9.1 C11.1 C12.1 C13.1 C14.1 C15.1 C16.1 C17.1 C18.1 C19.1 C24.1 C27.2 C28.2 C29.2 C31.2 C33.1 C34.2 C35.1 C37.2 C38.1 C40.2 C41.1 C43.1 C44.2 C46.2 C47.2 C48.2 C50.1 D2.1 D3.1 D4.1 J1.2 J2.2 P7.3 Q2.2 Q3.1 Q4.3 Q9.2 Q11.2 Q13.2 R3.2 R5.2 R9.2 R11.2 R13.2 R15.1 R20.1 R38.1 R52.1 T6.1 T7.1 T8.1 T13.1 T14.1 T16.1 T20.1 U2.8 U2.13 U2.19 U2.21 U2.27 U2.30 U2.31 U2.33 U2.36 U2.37 U2.45 U2.63 U2.66 U2.67 U2.69 U2.70 U2.71 U2.72 U2.73 U2.74 U2.75 U2.76 U2.77 U3.12 U3.18 U3.31 U3.47 U3.63 U8.2 U8.3 U8.5 U9.1 U9.2 U10.3 U10.11 U11.1 U11.9 U12.3 U13.6 U13.8 U14.1 U14.2 U14.3 U14.6 U14.7 U15.3 U15.5 U15.8 U15.9 U16.10 U17.1 U18.A2 U18.C2 U19.4 Y2.2 Y2.4 | length 114.9
  Top Layer w0.152: v1(-36.506,-33.358) -35.138,-34.726 R38.1@-35.138,-35.268 ; C13.1@-27.229,-34.504 -26.599,-33.875 -25.12,-33.875 -24.965,-34.03 U3.47@-23.788,-34.03 ; U2.73@-22.459,-5.231 U2.72@-19.559,-5.231 ; U2.63@-22.359,-14.931 -22.359,-12.131 U2.75@-22.459,-12.031 ; U2.66@-18.159,-14.931 U2.67@-16.759,-14.931 -16.759,-12.131 U2.69@-16.659,-12.031 ; U2.45@-14.208,-10.722 -15.349,-10.722 U2.69@-16.659,-12.031 ; C12.1@-6.835,-36.749 -6.36,-36.749 -5.964,-37.145 -5.964,-37.836 -5.731,-38.069 -4.364,-38.069 -4.136,-37.84 C7.2@-4.136,-37.314 ; U9.1@-5.478,-16.354 U9.2@-4.978,-16.354 ; U8.5@-0.591,-16.07 U8.2@-0.591,-16.645 U8.3@-0.116,-16.645 ; U2.75@-22.459,-12.031 U2.76@-19.559,-12.031 ; U2.75@-22.459,-12.031 U2.74@-22.459,-8.631 U2.77@-19.559,-8.631 ; U2.76@-19.559,-12.031 U2.77@-19.559,-8.631 ; U2.76@-19.559,-12.031 U2.69@-16.659,-12.031 ; U2.77@-19.559,-8.631 U2.72@-19.559,-5.231 ; U2.77@-19.559,-8.631 U2.70@-16.659,-8.631 ; U2.72@-19.559,-5.231 U2.71@-16.659,-5.231 U2.70@-16.659,-8.631 ; U2.69@-16.659,-12.031 U2.70@-16.659,-8.631
  Top Layer w0.254: v1(-38.089,-20.888) U14.2@-37.506,-20.888 ; v1(-37.9,-12.76) -37.9,-13.04 U15.8@-37.507,-13.434 U15.9@-37.507,-13.934 ; U14.3@-37.506,-21.388 U14.1@-37.506,-20.388 ; U13.8@-36.427,-27.701 -36.427,-27.964 -36.177,-28.214 U13.6@-35.914,-28.214 -35.313,-28.214 -34.937,-27.838 C40.2@-34.578,-27.838 ; U15.3@-35.982,-14.434 -35.982,-14.808 v1(-35.589,-15.2) ; U15.5@-35.982,-13.434 -35.832,-13.284 v1(-35.832,-12.709) ; C41.1@-35.876,-24.3 -35.876,-24.284 -36.876,-23.284 -36.876,-22.77 -36.356,-22.25 U14.6@-36.356,-22.048 U14.7@-35.856,-22.048 ; C38.1@-34.445,-24.286 -34.445,-24.742 -34.445,-25.722 v1(-33.668,-26.5) ; U3.47@-23.788,-34.03 -21.847,-34.03 v1(-21.055,-34.823) ; v1(-23.768,-24.321) -23.768,-23.68 -22.962,-22.873 -21.101,-22.873 -20.788,-23.186 U3.31@-20.788,-24.53 ; v1(-15.654,-34.86) -14.288,-36.225 U3.63@-14.288,-37.03 ; U3.18@-14.288,-24.53 -14.288,-26.181 -14.022,-26.448 -13.533,-26.448 v1(-13.219,-26.135) ; v1(-12.536,-29.184) -12.383,-29.03 U3.12@-11.288,-29.03
  Bottom Layer w0.152: v1(-36.506,-33.358) U18.C2@-35.987,-33.877
  Bottom Layer w0.203: C46.2@-33.672,-32.206 -33.672,-30.903 -33.045,-30.277 -30.888,-30.277 U10.11@-30.739,-30.128 U10.3@-30.739,-29.028 ; v1(-2.798,-5.836) -2.588,-5.625 C16.1@-1.975,-5.625 ; C14.1@-1.128,-9.461 -1.128,-8.21 C18.1@-1.067,-8.149
  Bottom Layer w0.254: v1(-37.355,-17.475) -37.127,-17.703 -36.568,-17.703 -36.119,-17.254 U19.4@-35.596,-17.254 ; U18.A2@-35.187,-33.877 -33.672,-32.361 C46.2@-33.672,-32.206 ; R20.1@-32.16,-17.191 -32.16,-15.785 C47.2@-32.527,-15.418 v1(-31.344,-15.418) ; Q11.2@-30.833,-20.14 -30.833,-18.257 v1(-30.262,-17.686) ; v1(-16.471,-31.977) -15.931,-31.977 ; v1@-16.253,-31.977 -15.931,-31.977 ; v1(-15.721,-28.432) -15.721,-27.584 -15.24,-27.103 -15.09,-27.103 ; -15.165,-27.177 -15.09,-27.103 ; C8.1@-14.754,-31.977 -15.931,-31.977 ; R5.2@-14.706,-28.322 -14.706,-27.487 -15.09,-27.103 ; C3.2@-14.69,-27.103 -15.09,-27.103 ; C37.2@-10.993,-22.635 -10.993,-22.939 v1(-9.967,-23.965) ; U12.3@-9.493,-20.314 v1(-8.87,-19.692)
  Bottom Layer w0.762: T16.1@-24.564,-39.793 -24.564,-38.763 D4.1@-23.386,-37.584
  other v1: -28.366,-40.526 -20.72,-40.12 -13.208,-40.03 -11.862,-40.005 -33.649,-39.663 -34.925,-39.522 -36.037,-38.291 -1.321,-37.236 0.66,-37.135 -22.149,-36.932 2.489,-36.881 -12.37,-36.068 -25.654,-35.789 -20.879,-32.868 -38.315,-31.831 -9.627,-31.318 -19.329,-31.267 -20.472,-30.328 -31.239,-30.128 -9.855,-29.566 -31.928,-27.076 -32.868,-26.822 -10.008,-26.67 -10.185,-25.044 -11.983,-24.931 0.864,-24.587 -7.899,-24.003 -0.025,-23.546 -36.68,-23.48 -4.343,-23.419 -29.317,-23.253 1.321,-22.987 -6.909,-22.885 -32.842,-22.784 -3.353,-22.708 2.794,-22.098 -15.767,-21.934 -1.067,-21.895 -28.677,-21.615 -32.283,-21.412 -1.499,-20.955 -24.505,-20.867 -25.502,-20.549 -23.216,-19.888 -24.587,-19.863 -15.621,-19.634 -14.777,-19.571 -33.909,-19.177 -0.914,-18.237 -31.217,-17.018 2.438,-16.612 -29.642,-15.316 2.159,-15.113 -8.763,-13.31 -31.191,-12.725 -32.131,-11.735 -23.47,-11.659 1.803,-10.795 -36.957,-10.668 -37.973,-10.49 -8.738,-10.16 -29.312,-9.804 2.591,-9.703 -15.799,-9.373 1.956,-9.22 -37.821,-8.712 -8.814,-7.925 -22.047,-7.518 -20.523,-7.468 2.946,-7.112 -20.472,-6.401 -21.819,-6.248 3.048,-5.588 -37.465,-4.877 -36.144,-4.75 -30.404,-4.47 -23.063,-4.394 3.048,-4.039 -6.812,-3.752 -37.008,-3.683 -36.043,-3.531 -37.871,-2.743 -36.703,-2.438 -11.024,-1.194 -28.245,-0.889 0.813,-0.889 -10.643,0.127
  other v3: -31.705,-39.095
CS: U3.50 U16.7 | length 27.8
  Top Layer w0.152: v1(-20.788,-38.489) U3.50@-20.788,-37.03 U3.50@-20.788,-37.703
  Mid-Layer 1 w0.152: v1(-18.358,-34.964) -16.656,-33.262 -6.428,-33.262 -4.388,-31.222 -4.388,-29.332 v1(-6.003,-27.717)
  Mid-Layer 2 w0.152: v1(-20.788,-38.489) -18.358,-36.058 v1(-18.358,-34.964)
  Bottom Layer w0.152: U16.7@-7.448,-27.717 v1(-6.003,-27.717)
DM: T2.1 U2.26 | length 32.8
  Top Layer w0.203: v1(-29.155,-6.981) U2.26@-27.559,-6.981
  Mid-Layer 2 w0.203: v1(-29.155,-6.981) -28.626,-6.452 -27.762,-6.452 -26.975,-5.664 -26.975,-3.099 -25.73,-1.854 -4.674,-1.854 -3.962,-1.143 -3.962,-0.305 -4.267,0 v1(-5.08,0)
DP: T3.1 U2.25 | length 36.1
  Top Layer w0.203: v1@-29.198,-5.881 U2.25@-27.559,-5.881
  Mid-Layer 2 w0.203: v1(-29.235,-5.918) -29.743,-6.426 -29.743,-7.544 -29.585,-7.702 -29.012,-7.702 -28.169,-6.858 -27.407,-6.858 -26.492,-5.944 -26.492,-3.302 -25.527,-2.337 -4.47,-2.337 -3.505,-1.372 -3.505,-0.279 -3.226,0 v1(-2.54,0)
DTR: Q7.3 R32.1 U2.6 | length 33.5
  Top Layer w0.254: U2.6@-11.659,-9.181 -11.621,-9.144 -10.109,-9.144 -9.906,-9.347 v1(-9.906,-10.084)
  Mid-Layer 1 w0.254: v1(-25.629,-10.262) -25.629,-7.747 -25.019,-7.137 -24.003,-7.137 -20.523,-10.617 -10.439,-10.617 v1(-9.906,-10.084)
  Mid-Layer 2 w0.254: v1(-25.877,-15.355) -25.877,-10.51 v1(-25.629,-10.262)
  Bottom Layer w0.254: v1(-25.877,-15.355) -25.877,-16.676 -25.47,-17.082 -23.921,-17.082 -23.751,-16.912 R32.1@-23.751,-16.447 -23.73,-16.426 Q7.3@-23.73,-15.077
EN_3V8: R52.2 U3.36 U19.2 | length 18.2
  Top Layer w0.203: v1@-27.298,-27.542 v1(-27.298,-27.423) -26.191,-28.53 U3.36@-23.788,-28.53
  Bottom Layer w0.203: U19.2@-35.088,-18.615 -35.088,-19.848 R52.2@-35.566,-20.326 -35.195,-20.697 -35.195,-22.475 -31.617,-26.053 -30.686,-26.984 -27.737,-26.984 v1(-27.298,-27.423)
EN_5V: R38.2 U3.45 U18.C1 | length 23.7
  Top Layer w0.203: v1@-36.595,-34.811 R38.2@-36.138,-35.268 ; U3.45@-23.788,-33.03 -22.628,-33.03 v1(-21.616,-32.019)
  Mid-Layer 1 w0.203: v1(-36.595,-34.634) -35.554,-34.634 -32.938,-37.25 -26.026,-37.25 -24.937,-36.161 -24.937,-33.668 -23.287,-32.019 v1(-21.616,-32.019)
  Bottom Layer w0.203: v1(-36.595,-34.634) -36.239,-34.277 U18.C1@-35.987,-34.277
EN_5V1: R37.2 U3.35 | length 13
  Top Layer w0.203: v1(-27.115,-26.669) -25.754,-28.03 U3.35@-23.788,-28.03
  Mid-Layer 1 w0.203: v1(-32.46,-24.238) -29.546,-24.238 v1(-27.115,-26.669)
  Bottom Layer w0.203: R37.2@-34.352,-22.225 -34.352,-22.346 v1(-32.46,-24.238)
EN_5V2: R51.2 U3.37 | length 16.3
  Top Layer w0.203: v1(-27.873,-27.803) -26.645,-29.03 U3.37@-23.788,-29.03
  Bottom Layer w0.203: R51.2@-37.672,-24.848 -37.057,-25.464 -35.442,-25.464 -34.66,-24.682 -33.484,-24.682 -32.528,-25.638 -30.764,-27.403 -28.273,-27.403 v1(-27.873,-27.803)
GPS_RXD: Q21.3 R47.1 U2.62 | length 20.4
  Top Layer w0.203: v1(-9.754,-11.963) -9.433,-12.284 Q21.3@-8.063,-12.284 -8.063,-12.994 -7.341,-13.716 R47.1@-7.341,-14.605
  Mid-Layer 1 w0.203: v1(-24.689,-9.398) -22.123,-11.963 v1(-9.754,-11.963)
GPS_TXD: Q19.2 U2.61 | length 27.5
  Top Layer w0.254: v1(-0.483,-11.659) -0.438,-11.614 Q19.2@0.635,-11.614
  Mid-Layer 1 w0.254: v1(-24.689,-8.052) -21.514,-11.227 -6.731,-11.227 -5.969,-10.465 -1.676,-10.465 v1(-0.483,-11.659)
MDTR: Q7.2 U3.21 | length 33.7
  Top Layer w0.254: v1(-16.851,-27.07) -16.141,-27.07 -15.788,-26.717 U3.21@-15.788,-24.53
  Mid-Layer 2 w0.254: v1(-24.994,-13.868) -24.136,-13.011 -17.973,-13.011 -17.405,-13.578 -17.405,-20.334 ; -17.405,-25.904 -17.405,-20.334 ; v1(-16.851,-27.07) -17.405,-26.515 -17.405,-20.334
  Bottom Layer w0.254: v1(-24.994,-13.868) -24.663,-13.868 -23.372,-12.577 Q7.2@-22.73,-12.577
MISO: U3.44 U16.8 | length 28.3
  Top Layer w0.152: U3.44@-23.788,-32.53 -22.969,-32.53 -21.467,-31.028 v1@-20.484,-31.028
  Mid-Layer 1 w0.152: v1(-20.469,-31.043) -18.606,-32.906 -6.621,-32.906 -5.854,-32.14 -4.759,-31.044 -4.759,-29.654 -6.718,-27.695 -6.718,-27.162 v1(-6.003,-26.447)
  Bottom Layer w0.152: U16.8@-7.448,-26.447 v1(-6.003,-26.447)
MOSI: U3.57 U16.15 | length 22.9
  Top Layer w0.152: U3.57@-17.288,-37.03 -17.288,-38.773 v1(-16.984,-39.078)
  Mid-Layer 1 w0.152: v1(-16.984,-39.078) -14.586,-36.68 -5.825,-36.68 -3.874,-34.728 -0.844,-34.728 v1(-0.183,-34.067)
  Bottom Layer w0.152: v1(-0.183,-34.067) U16.15@1.702,-34.067
MRI: Q6.3 R30.1 U3.22 | length 13.9
  Top Layer w0.254: v1@-16.288,-26.44 U3.22@-16.288,-24.53
  Mid-Layer 2 w0.254: v1(-16.662,-19.253) -16.661,-26.095 v1(-16.302,-26.454)
  Bottom Layer w0.254: v1(-16.662,-19.253) -15.543,-18.134 R30.1@-15.543,-16.365 -15.515,-16.338 Q6.3@-15.515,-15.083
NBIOT_GRXD: Q19.3 R43.1 U3.17 | length 25.1
  Top Layer w0.254: U3.17@-13.788,-24.53 -12.577,-24.53 v1(-12.01,-23.964) ; Q19.3@-1.865,-12.614 -1.865,-11.441 -1.473,-11.049 -1.473,-10.287 R43.1@-1.372,-10.185
  Mid-Layer 2 w0.254: v1(-12.01,-23.964) -11.905,-23.964 -6.862,-18.921 -6.862,-11.942 -5.461,-10.541 -3.023,-10.541 -1.854,-11.709 v1(-1.854,-11.913)
NBIOT_GTXD: Q21.2 U3.16 | length 19.8
  Top Layer w0.254: U3.16@-11.288,-27.03 -11.288,-24.621 v1@-10.766,-24.099 ; Q21.2@-5.563,-11.284 -4.337,-11.284 v1(-4.318,-11.303)
  Mid-Layer 2 w0.254: v1(-10.772,-24.072) -10.772,-23.771 -5.909,-18.908 -5.909,-14.698 -4.318,-13.106 v1(-4.318,-11.303)
NBIOT_NRXD: Q18.3 R42.1 U3.59 | length 34.8
  Top Layer w0.254: U3.59@-16.288,-37.03 -16.288,-35.447 v1(-16.287,-35.445)
  Mid-Layer 1 w0.254: v1@-16.288,-35.422 -5.204,-35.422 v1(-4.06,-34.279)
  Mid-Layer 2 w0.254: v1(-4.557,-17.288) -5.129,-17.861 -5.129,-19.914 -5.129,-28.141 -4.06,-29.21 v1(-4.06,-34.279)
  Bottom Layer w0.254: v1@-4.522,-17.307 Q18.3@-3.42,-17.307 -3.42,-16.438 -3.138,-16.156 R42.1@-3.138,-15.686
NBIOT_NTXD: Q20.2 U3.58 | length 28.7
  Top Layer w0.254: U3.58@-16.804,-37.081 v1(-16.804,-35.017)
  Mid-Layer 2 w0.254: v1(-18.813,-14.057) -18.411,-14.459 -18.411,-20.705 -22.117,-24.412 -22.117,-30.282 -21.656,-30.743 -17.383,-35.017 v1(-16.804,-35.017)
  Bottom Layer w0.254: v1(-18.813,-14.057) -18.411,-13.655 Q20.2@-18.411,-12.766
NET: J1.1 U2.32 | length 14.5
  Top Layer w0.508: J1.1@-32.241,-2.334 J1.1@-32.241,-2.09 -32.241,-2.902 ccw(c-29.701,-2.902) -31.497,-4.698 -30.963,-5.232 cw(c-32.312,-6.581) -30.404,-6.581 -30.404,-11.889 ccw(c-28.322,-11.889) -29.794,-13.36 ccw(c-29.261,-12.827) -29.657,-13.469 ccw(c-29.261,-12.827) -29.261,-13.581 U2.32@-27.559,-13.581
NET_LIGHT: LED1.1 U2.41 | length 10.9
  Top Layer w0.203: U2.41@-16.309,-17.531 -16.309,-18.515 -15.748,-19.075 -13.227,-19.075 -12.77,-18.618 -8.179,-18.618 -7.645,-19.152 -7.645,-19.736 LED1.1@-7.645,-19.812
NetBATT_2: BATT.2 R7.2 U3.1 | length 10.3
  Top Layer w0.254: v1(-13.099,-36.061) -13.099,-35.251 -12.379,-34.53 U3.1@-11.288,-34.53
  Bottom Layer w0.508: -20.077,-36.292 -19.735,-36.634 BATT.2@-16.84,-36.634 -13.672,-36.634 v1(-13.099,-36.061)
NetC3_1: C3.1 R2.2 R5.1 U3.8 | length 6
  Top Layer w0.254: v1@-13.723,-29.134 -13.723,-30.284 -12.976,-31.03 U3.8@-11.288,-31.03
  Bottom Layer w0.254: v1(-13.748,-29.141) -13.748,-28.364 R5.1@-13.706,-28.322 -13.706,-27.119 C3.1@-13.69,-27.103
NetC4_2: C4.2 R1.1 U3.5 Y2.1 | length 15.4
  Top Layer w0.152: U3.5@-11.288,-32.53 -9.16,-32.53 -6.138,-29.508 -3.758,-29.508 R1.1@-3.404,-29.862 -1.093,-29.862 Y2.1@0.003,-30.958 1.573,-30.958 C4.2@2.09,-30.441
NetC5_1: C5.1 U3.4 Y1.2 | length 8.1
  Top Layer w0.152: U3.4@-11.288,-33.03 -8.597,-33.03 -7.46,-34.167 -6.858,-34.167 -6.216,-33.525 Y1.2@-5.629,-33.525 -5.629,-32.571 C5.1@-5.095,-32.038
NetC6_2: C6.2 R1.2 U3.6 Y2.3 | length 13.2
  Top Layer w0.152: U3.6@-11.288,-32.03 U3.6@-11.204,-32.03 ; U3.6@-11.265,-32.091 U3.6@-11.204,-32.03 ; C6.2@-1.694,-26.531 -1.694,-28.725 Y2.3@-1.71,-28.741 -3.283,-28.741 R1.2@-3.404,-28.862 -3.542,-28.862 -3.847,-29.168 -6.254,-29.168 -9.116,-32.03 U3.6@-11.204,-32.03
NetC7_1: C7.1 U3.3 Y1.1 | length 8.4
  Top Layer w0.152: U3.3@-11.288,-33.53 -8.87,-33.53 -7.819,-34.581 -6.653,-34.581 -5.629,-35.605 Y1.1@-5.629,-35.684 -5.629,-36.821 C7.1@-5.136,-37.314
NetC8_2: C8.2 R6.2 U3.7 | length 3.9
  Top Layer w0.152: v1(-12.909,-31.591) -12.848,-31.53 U3.7@-11.288,-31.53
  Bottom Layer w0.152: R6.2@-13.754,-30.691 C8.2@-13.754,-31.977 -13.295,-31.977 v1(-12.909,-31.591)
NetC20_2: C20.2 U9.6 | length 1.6
  Top Layer w0.203: C20.2@-7.103,-15.824 -5.508,-15.824 U9.6@-5.478,-15.854
NetC27_1: C27.1 D2.2 Q3.3 U10.1 | length 15.1
  Top Layer w0.203: C27.1@-30.248,-32.697 -29.098,-33.846
  Mid-Layer 1 w1.27: v3(-32.564,-28.025) -32.564,-30.242 -28.96,-33.846 v3(-28.545,-33.846)
  Bottom Layer w0.381: -32.564,-28.761 -32.298,-29.028 U10.1@-31.739,-29.028
  Bottom Layer w0.762: Q3.3@-30.382,-32.489 -29.025,-33.846 v3(-28.545,-33.846)
  Bottom Layer w1.016: -32.564,-28.761 v3(-32.564,-28.025)
  Bottom Layer w1.27: v3(-28.545,-33.846) D2.2@-26.836,-33.846